# Altium PCB ADD.PcbDoc (part 1 of 3)
Units mm, origin at the board's own origin, x right, y up, seen from the top; angles counter-clockwise.
Board outline 193.67 x 275.84 mm, 2 copper layers (Top Layer, Bottom Layer); 216 components, 0 nets, 1200 pads, 0 vias.
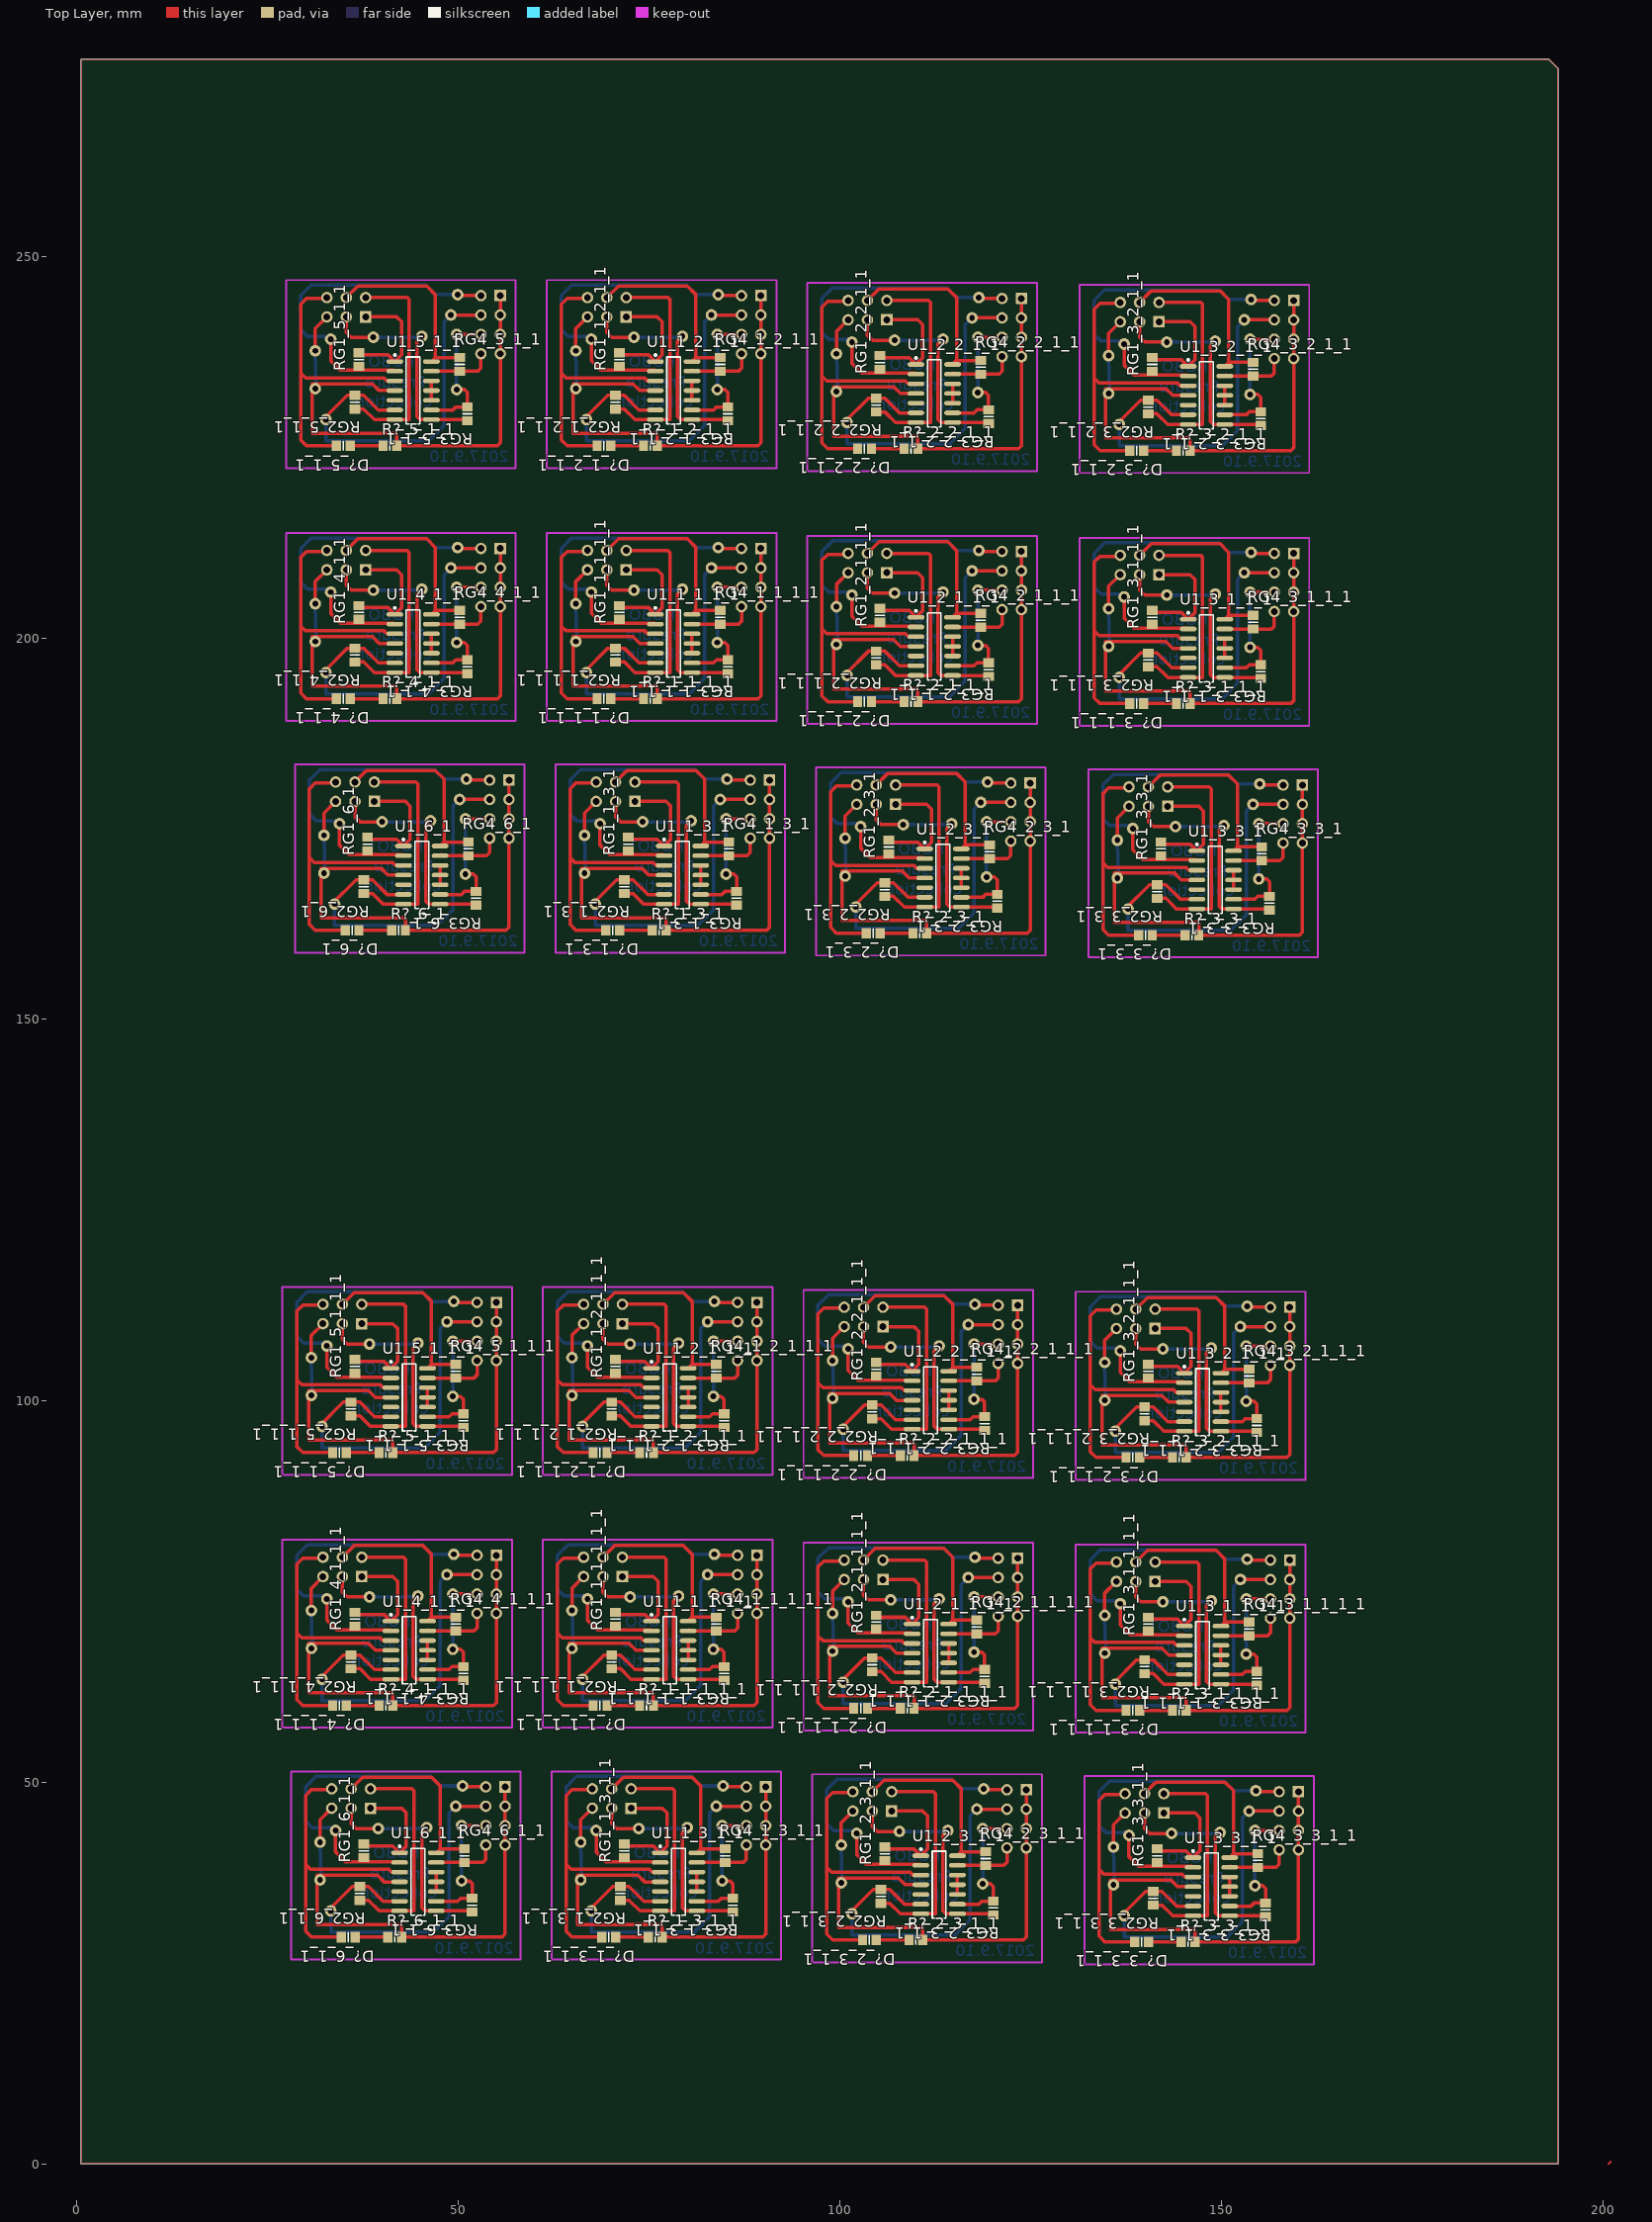
[diagram p0: Top Layer view]
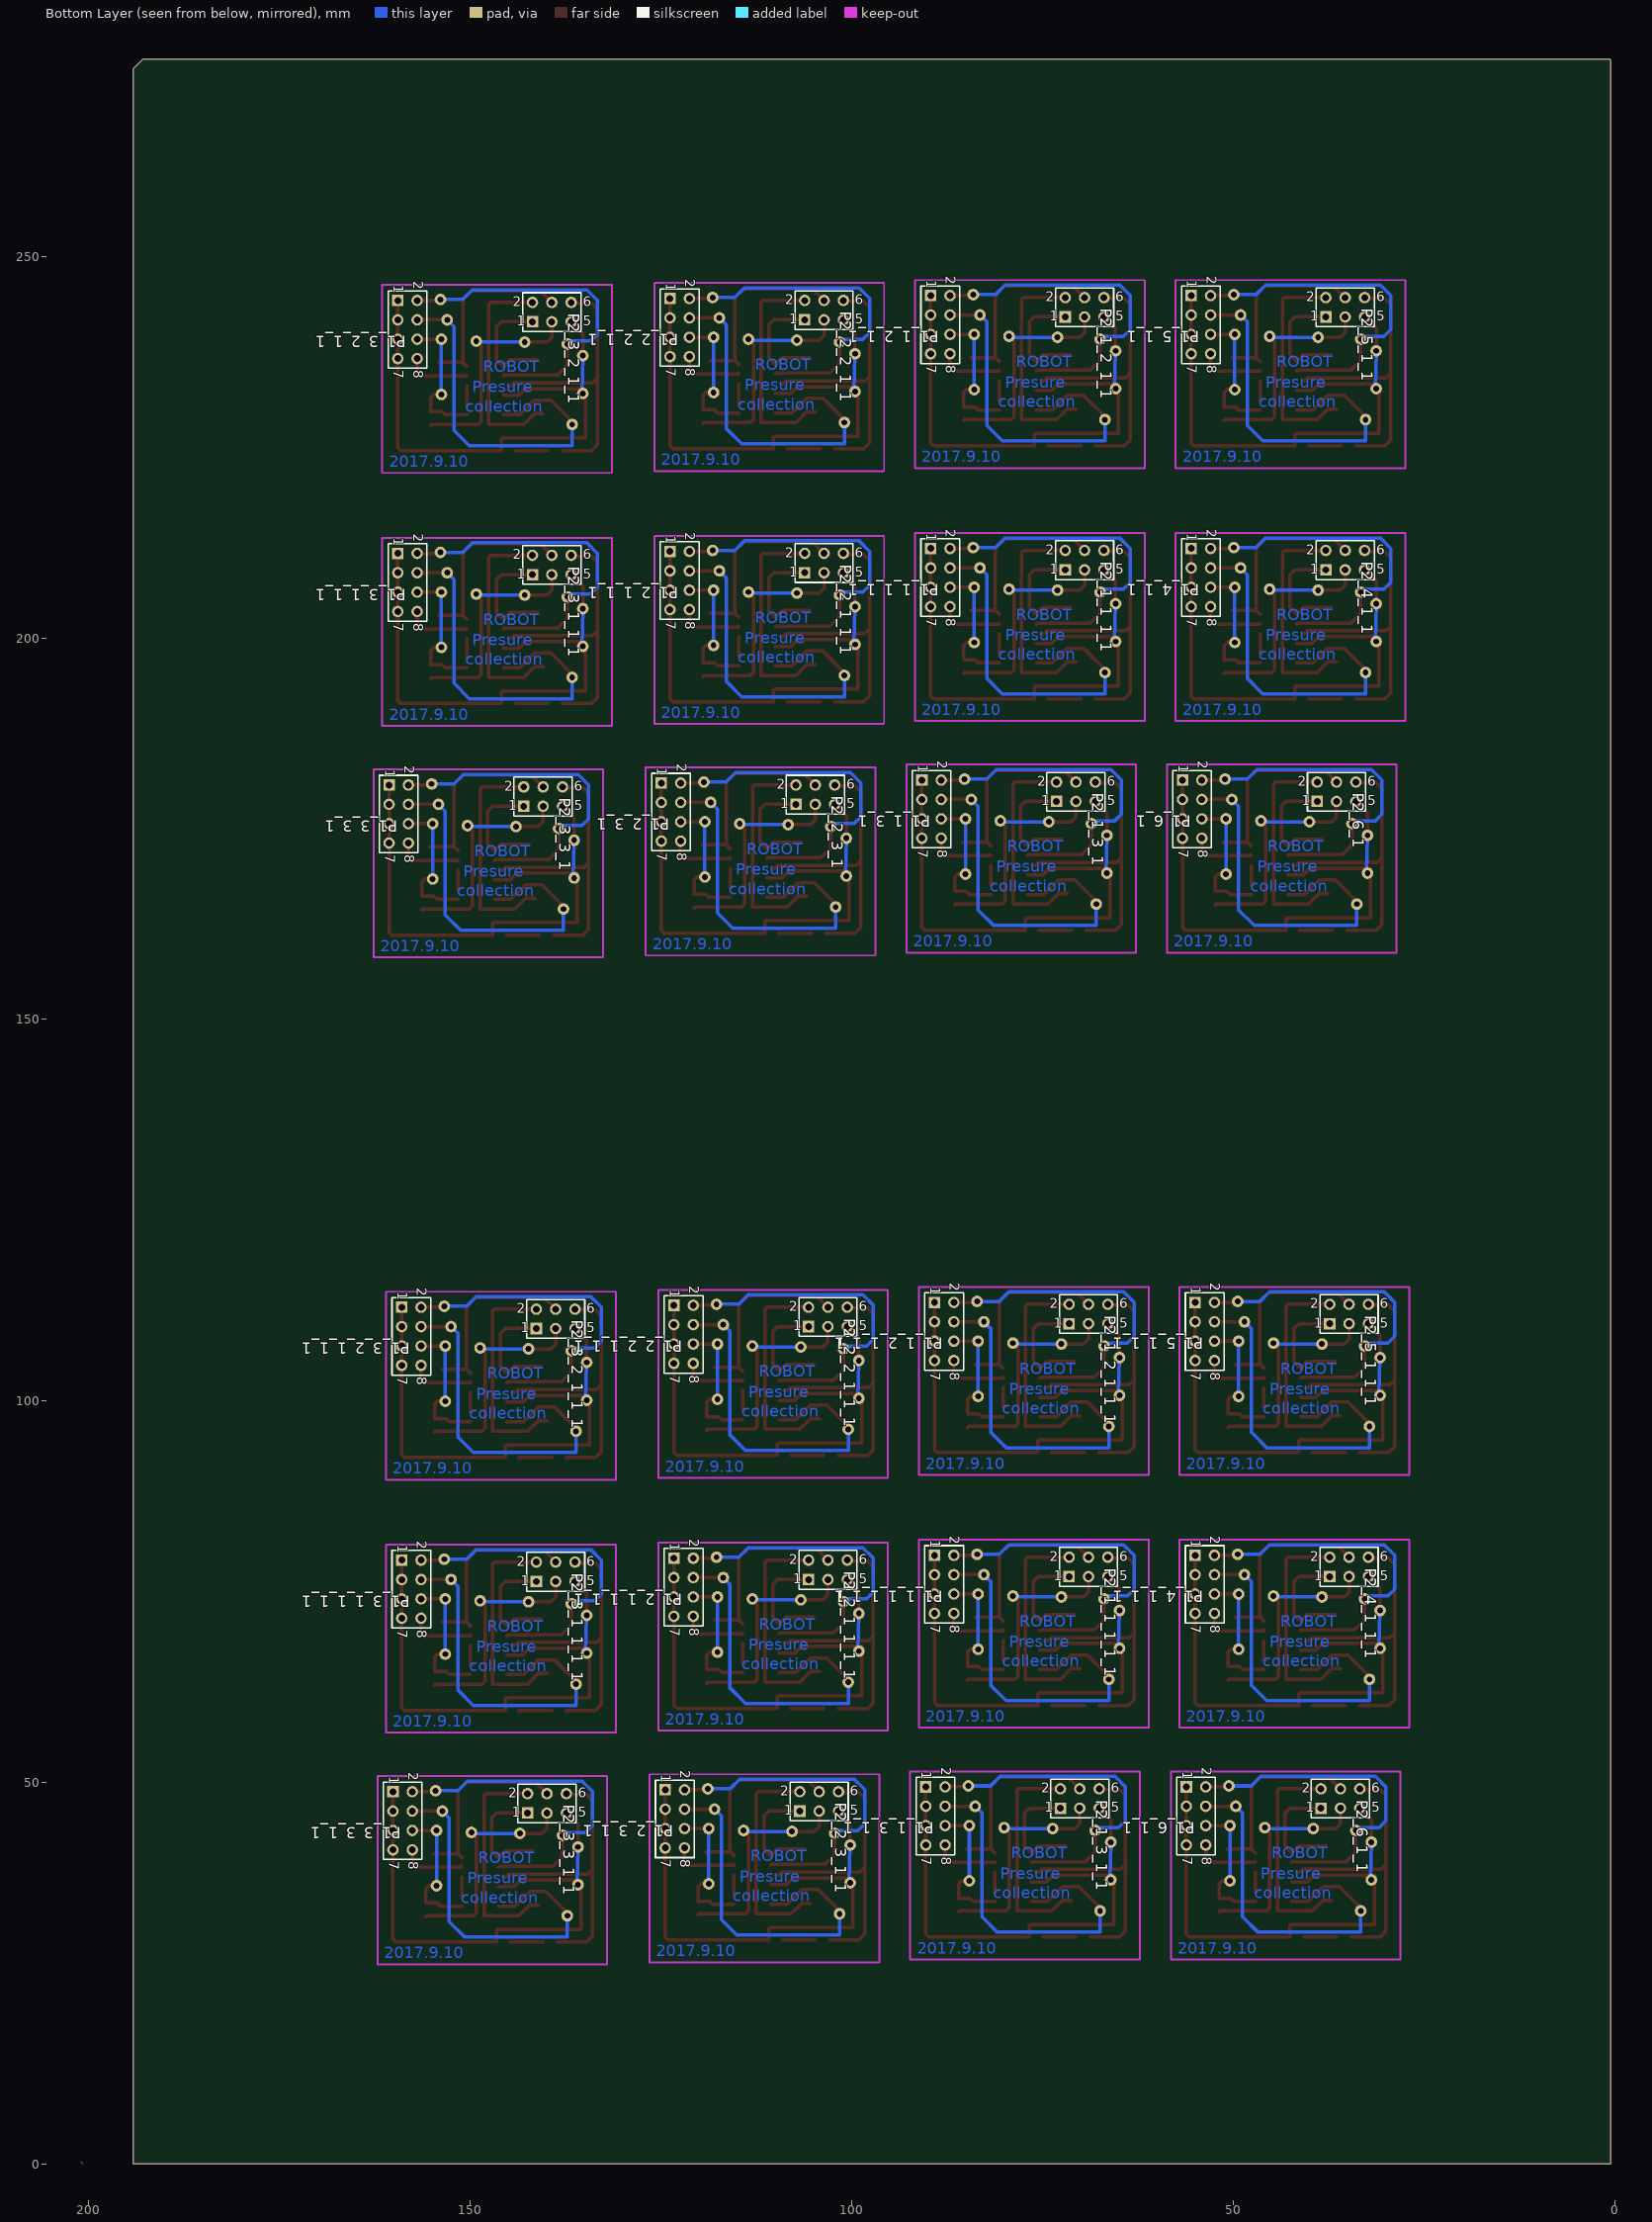
[diagram p1: Bottom Layer view, seen from below]

## Layer stack, top to bottom
Top Solder: solder mask 0.0102, Solder Resist, Dk 3.5
Top Layer: signal copper 0.0356
Dielectric1: dielectric 0.32, FR-4, Dk 4.8
Bottom Layer: signal copper 0.0356
Bottom Solder: solder mask 0.0102, Solder Resist, Dk 3.5

## Board outline
0.508,0 0.508,275.717 0.635,275.844 192.913,275.844 194.183,274.574 194.183,0

## Design rules (kind name [scope] priority, off if disabled: settings)
Clearance [All] p1: gap=0.254 ignorepadtopadclearanceinfootprint=FALSE except(0: Arc-Hole Track-Hole SMDPad-Hole THPad-Hole Via-Hole Fill-Hole Poly-Hole Region-Hole Text-Hole)
PolygonConnect [All] p1: connectstyle=Relief reliefconductorwidth=0.254 reliefentries=4 polygonreliefangle="90 Angle" airgapwidth=0.254
RoutingVias [All] p1: holewidth=0.711 width=1.27 viastyle="Through Hole" minholewidth=0.711 minwidth=1.27 maxholewidth=0.711 maxwidth=1.27
SilkToSolderMaskClearance SilkscreenOverComponentPads [IsPad] p1: minsilkscreentomaskgap=0.254 clearancetoexposedcopper=TRUE
SolderMaskExpansion [All] p1: expansion=0.102
Width [All] p1: maxlimit=0.254 minlimit=0.254 preferedwidth=0.254
29 further rules are at their usual default settings.

## Components (designator, comment, footprint, x,y, rotation, side; value= is the part's Value field where it differs from the comment)
D?_1_1_1_1 "LED3" 6-0805_N 69.075,192.024 r180 top (schematic designator D?)
D?_1_1_1_1_1 "LED3" 6-0805_N 68.567,60.071 r180 top (schematic designator D?)
D?_1_2_1_1 "LED3" 6-0805_N 69.075,225.171 r180 top (schematic designator D?)
D?_1_2_1_1_1 "LED3" 6-0805_N 68.567,93.218 r180 top (schematic designator D?)
D?_1_3_1 "LED3" 6-0805_N 70.218,161.671 r180 top (schematic designator D?)
D?_1_3_1_1 "LED3" 6-0805_N 69.71,29.718 r180 top (schematic designator D?)
D?_2_1_1_1 "LED3" 6-0805_N 103.238,191.643 r180 top (schematic designator D?)
D?_2_1_1_1_1 "LED3" 6-0805_N 102.73,59.69 r180 top (schematic designator D?)
D?_2_2_1_1 "LED3" 6-0805_N 103.238,224.79 r180 top (schematic designator D?)
D?_2_2_1_1_1 "LED3" 6-0805_N 102.73,92.837 r180 top (schematic designator D?)
D?_2_3_1 "LED3" 6-0805_N 104.381,161.29 r180 top (schematic designator D?)
D?_2_3_1_1 "LED3" 6-0805_N 103.873,29.337 r180 top (schematic designator D?)
D?_3_1_1_1 "LED3" 6-0805_N 138.925,191.389 r180 top (schematic designator D?)
D?_3_1_1_1_1 "LED3" 6-0805_N 138.417,59.436 r180 top (schematic designator D?)
D?_3_2_1_1 "LED3" 6-0805_N 138.925,224.536 r180 top (schematic designator D?)
D?_3_2_1_1_1 "LED3" 6-0805_N 138.417,92.583 r180 top (schematic designator D?)
D?_3_3_1 "LED3" 6-0805_N 140.068,161.036 r180 top (schematic designator D?)
D?_3_3_1_1 "LED3" 6-0805_N 139.56,29.083 r180 top (schematic designator D?)
D?_4_1_1 "LED3" 6-0805_N 34.912,192.024 r180 top (schematic designator D?)
D?_4_1_1_1 "LED3" 6-0805_N 34.404,60.071 r180 top (schematic designator D?)
D?_5_1_1 "LED3" 6-0805_N 34.912,225.171 r180 top (schematic designator D?)
D?_5_1_1_1 "LED3" 6-0805_N 34.404,93.218 r180 top (schematic designator D?)
D?_6_1 "LED3" 6-0805_N 36.055,161.671 r180 top (schematic designator D?)
D?_6_1_1 "LED3" 6-0805_N 35.547,29.718 r180 top (schematic designator D?)
P1_1_1_1_1 "FOOT" HDR2X4 89.649,211.709 r270 bottom (schematic designator P1)
P1_1_1_1_1_1 "FOOT" HDR2X4 89.141,79.756 r270 bottom (schematic designator P1)
P1_1_2_1_1 "FOOT" HDR2X4 89.649,244.856 r270 bottom (schematic designator P1)
P1_1_2_1_1_1 "FOOT" HDR2X4 89.141,112.903 r270 bottom (schematic designator P1)
P1_1_3_1 "FOOT" HDR2X4 90.792,181.356 r270 bottom (schematic designator P1)
P1_1_3_1_1 "FOOT" HDR2X4 90.284,49.403 r270 bottom (schematic designator P1)
P1_2_1_1_1 "FOOT" HDR2X4 123.812,211.328 r270 bottom (schematic designator P1)
P1_2_1_1_1_1 "FOOT" HDR2X4 123.304,79.375 r270 bottom (schematic designator P1)
P1_2_2_1_1 "FOOT" HDR2X4 123.812,244.475 r270 bottom (schematic designator P1)
P1_2_2_1_1_1 "FOOT" HDR2X4 123.304,112.522 r270 bottom (schematic designator P1)
P1_2_3_1 "FOOT" HDR2X4 124.955,180.975 r270 bottom (schematic designator P1)
P1_2_3_1_1 "FOOT" HDR2X4 124.447,49.022 r270 bottom (schematic designator P1)
P1_3_1_1_1 "FOOT" HDR2X4 159.499,211.074 r270 bottom (schematic designator P1)
P1_3_1_1_1_1 "FOOT" HDR2X4 158.991,79.121 r270 bottom (schematic designator P1)
P1_3_2_1_1 "FOOT" HDR2X4 159.499,244.221 r270 bottom (schematic designator P1)
P1_3_2_1_1_1 "FOOT" HDR2X4 158.991,112.268 r270 bottom (schematic designator P1)
P1_3_3_1 "FOOT" HDR2X4 160.642,180.721 r270 bottom (schematic designator P1)
P1_3_3_1_1 "FOOT" HDR2X4 160.134,48.768 r270 bottom (schematic designator P1)
P1_4_1_1 "FOOT" HDR2X4 55.486,211.709 r270 bottom (schematic designator P1)
P1_4_1_1_1 "FOOT" HDR2X4 54.978,79.756 r270 bottom (schematic designator P1)
P1_5_1_1 "FOOT" HDR2X4 55.486,244.856 r270 bottom (schematic designator P1)
P1_5_1_1_1 "FOOT" HDR2X4 54.978,112.903 r270 bottom (schematic designator P1)
P1_6_1 "FOOT" HDR2X4 56.629,181.356 r270 bottom (schematic designator P1)
P1_6_1_1 "FOOT" HDR2X4 56.121,49.403 r270 bottom (schematic designator P1)
P2_1_1_1_1 "foot" HDR2X3 71.996,208.915 r180 bottom (schematic designator P2)
P2_1_1_1_1_1 "foot" HDR2X3 71.488,76.962 r180 bottom (schematic designator P2)
P2_1_2_1_1 "foot" HDR2X3 71.996,242.062 r180 bottom (schematic designator P2)
P2_1_2_1_1_1 "foot" HDR2X3 71.488,110.109 r180 bottom (schematic designator P2)
P2_1_3_1 "foot" HDR2X3 73.139,178.562 r180 bottom (schematic designator P2)
P2_1_3_1_1 "foot" HDR2X3 72.631,46.609 r180 bottom (schematic designator P2)
P2_2_1_1_1 "foot" HDR2X3 106.159,208.534 r180 bottom (schematic designator P2)
P2_2_1_1_1_1 "foot" HDR2X3 105.651,76.581 r180 bottom (schematic designator P2)
P2_2_2_1_1 "foot" HDR2X3 106.159,241.681 r180 bottom (schematic designator P2)
P2_2_2_1_1_1 "foot" HDR2X3 105.651,109.728 r180 bottom (schematic designator P2)
P2_2_3_1 "foot" HDR2X3 107.302,178.181 r180 bottom (schematic designator P2)
P2_2_3_1_1 "foot" HDR2X3 106.794,46.228 r180 bottom (schematic designator P2)
P2_3_1_1_1 "foot" HDR2X3 141.846,208.28 r180 bottom (schematic designator P2)
P2_3_1_1_1_1 "foot" HDR2X3 141.338,76.327 r180 bottom (schematic designator P2)
P2_3_2_1_1 "foot" HDR2X3 141.846,241.427 r180 bottom (schematic designator P2)
P2_3_2_1_1_1 "foot" HDR2X3 141.338,109.474 r180 bottom (schematic designator P2)
P2_3_3_1 "foot" HDR2X3 142.989,177.927 r180 bottom (schematic designator P2)
P2_3_3_1_1 "foot" HDR2X3 142.481,45.974 r180 bottom (schematic designator P2)
P2_4_1_1 "foot" HDR2X3 37.833,208.915 r180 bottom (schematic designator P2)
P2_4_1_1_1 "foot" HDR2X3 37.325,76.962 r180 bottom (schematic designator P2)
P2_5_1_1 "foot" HDR2X3 37.833,242.062 r180 bottom (schematic designator P2)
P2_5_1_1_1 "foot" HDR2X3 37.325,110.109 r180 bottom (schematic designator P2)
P2_6_1 "foot" HDR2X3 38.976,178.562 r180 bottom (schematic designator P2)
P2_6_1_1 "foot" HDR2X3 38.468,46.609 r180 bottom (schematic designator P2)
R?_1_1_1_1 "Res3" 6-0805_N 75.171,192.024 r0 top value=1K (schematic designator R?)
R?_1_1_1_1_1 "Res3" 6-0805_N 74.663,60.071 r0 top value=1K (schematic designator R?)
R?_1_2_1_1 "Res3" 6-0805_N 75.171,225.171 r0 top value=1K (schematic designator R?)
R?_1_2_1_1_1 "Res3" 6-0805_N 74.663,93.218 r0 top value=1K (schematic designator R?)
R?_1_3_1 "Res3" 6-0805_N 76.314,161.671 r0 top value=1K (schematic designator R?)
R?_1_3_1_1 "Res3" 6-0805_N 75.806,29.718 r0 top value=1K (schematic designator R?)
R?_2_1_1_1 "Res3" 6-0805_N 109.334,191.643 r0 top value=1K (schematic designator R?)
R?_2_1_1_1_1 "Res3" 6-0805_N 108.826,59.69 r0 top value=1K (schematic designator R?)
R?_2_2_1_1 "Res3" 6-0805_N 109.334,224.79 r0 top value=1K (schematic designator R?)
R?_2_2_1_1_1 "Res3" 6-0805_N 108.826,92.837 r0 top value=1K (schematic designator R?)
R?_2_3_1 "Res3" 6-0805_N 110.477,161.29 r0 top value=1K (schematic designator R?)
R?_2_3_1_1 "Res3" 6-0805_N 109.969,29.337 r0 top value=1K (schematic designator R?)
R?_3_1_1_1 "Res3" 6-0805_N 145.021,191.389 r0 top value=1K (schematic designator R?)
R?_3_1_1_1_1 "Res3" 6-0805_N 144.513,59.436 r0 top value=1K (schematic designator R?)
R?_3_2_1_1 "Res3" 6-0805_N 145.021,224.536 r0 top value=1K (schematic designator R?)
R?_3_2_1_1_1 "Res3" 6-0805_N 144.513,92.583 r0 top value=1K (schematic designator R?)
R?_3_3_1 "Res3" 6-0805_N 146.164,161.036 r0 top value=1K (schematic designator R?)
R?_3_3_1_1 "Res3" 6-0805_N 145.656,29.083 r0 top value=1K (schematic designator R?)
R?_4_1_1 "Res3" 6-0805_N 41.008,192.024 r0 top value=1K (schematic designator R?)
R?_4_1_1_1 "Res3" 6-0805_N 40.5,60.071 r0 top value=1K (schematic designator R?)
R?_5_1_1 "Res3" 6-0805_N 41.008,225.171 r0 top value=1K (schematic designator R?)
R?_5_1_1_1 "Res3" 6-0805_N 40.5,93.218 r0 top value=1K (schematic designator R?)
R?_6_1 "Res3" 6-0805_N 42.151,161.671 r0 top value=1K (schematic designator R?)
R?_6_1_1 "Res3" 6-0805_N 41.643,29.718 r0 top value=1K (schematic designator R?)
RG1_1_1_1_1 "RES" 6-0805_N 71.107,203.327 r90 top value=4.7K (schematic designator RG1)
RG1_1_1_1_1_1 "RES" 6-0805_N 70.599,71.374 r90 top value=4.7K (schematic designator RG1)
RG1_1_2_1_1 "RES" 6-0805_N 71.107,236.474 r90 top value=4.7K (schematic designator RG1)
RG1_1_2_1_1_1 "RES" 6-0805_N 70.599,104.521 r90 top value=4.7K (schematic designator RG1)
RG1_1_3_1 "RES" 6-0805_N 72.25,172.974 r90 top value=4.7K (schematic designator RG1)
RG1_1_3_1_1 "RES" 6-0805_N 71.742,41.021 r90 top value=4.7K (schematic designator RG1)
RG1_2_1_1_1 "RES" 6-0805_N 105.27,202.946 r90 top value=4.7K (schematic designator RG1)
RG1_2_1_1_1_1 "RES" 6-0805_N 104.762,70.993 r90 top value=4.7K (schematic designator RG1)
RG1_2_2_1_1 "RES" 6-0805_N 105.27,236.093 r90 top value=4.7K (schematic designator RG1)
RG1_2_2_1_1_1 "RES" 6-0805_N 104.762,104.14 r90 top value=4.7K (schematic designator RG1)
RG1_2_3_1 "RES" 6-0805_N 106.413,172.593 r90 top value=4.7K (schematic designator RG1)
RG1_2_3_1_1 "RES" 6-0805_N 105.905,40.64 r90 top value=4.7K (schematic designator RG1)
RG1_3_1_1_1 "RES" 6-0805_N 140.957,202.692 r90 top value=4.7K (schematic designator RG1)
RG1_3_1_1_1_1 "RES" 6-0805_N 140.449,70.739 r90 top value=4.7K (schematic designator RG1)
RG1_3_2_1_1 "RES" 6-0805_N 140.957,235.839 r90 top value=4.7K (schematic designator RG1)
RG1_3_2_1_1_1 "RES" 6-0805_N 140.449,103.886 r90 top value=4.7K (schematic designator RG1)
RG1_3_3_1 "RES" 6-0805_N 142.1,172.339 r90 top value=4.7K (schematic designator RG1)
RG1_3_3_1_1 "RES" 6-0805_N 141.592,40.386 r90 top value=4.7K (schematic designator RG1)
RG1_4_1_1 "RES" 6-0805_N 36.944,203.327 r90 top value=4.7K (schematic designator RG1)
RG1_4_1_1_1 "RES" 6-0805_N 36.436,71.374 r90 top value=4.7K (schematic designator RG1)
RG1_5_1_1 "RES" 6-0805_N 36.944,236.474 r90 top value=4.7K (schematic designator RG1)
RG1_5_1_1_1 "RES" 6-0805_N 36.436,104.521 r90 top value=4.7K (schematic designator RG1)
RG1_6_1 "RES" 6-0805_N 38.087,172.974 r90 top value=4.7K (schematic designator RG1)
RG1_6_1_1 "RES" 6-0805_N 37.579,41.021 r90 top value=4.7K (schematic designator RG1)
RG2_1_1_1_1 "RES" 6-0805_N 70.599,197.739 r270 top value=4.7K (schematic designator RG2)
RG2_1_1_1_1_1 "RES" 6-0805_N 70.091,65.786 r270 top value=4.7K (schematic designator RG2)
RG2_1_2_1_1 "RES" 6-0805_N 70.599,230.886 r270 top value=4.7K (schematic designator RG2)
RG2_1_2_1_1_1 "RES" 6-0805_N 70.091,98.933 r270 top value=4.7K (schematic designator RG2)
RG2_1_3_1 "RES" 6-0805_N 71.742,167.386 r270 top value=4.7K (schematic designator RG2)
RG2_1_3_1_1 "RES" 6-0805_N 71.234,35.433 r270 top value=4.7K (schematic designator RG2)
RG2_2_1_1_1 "RES" 6-0805_N 104.762,197.358 r270 top value=4.7K (schematic designator RG2)
RG2_2_1_1_1_1 "RES" 6-0805_N 104.254,65.405 r270 top value=4.7K (schematic designator RG2)
RG2_2_2_1_1 "RES" 6-0805_N 104.762,230.505 r270 top value=4.7K (schematic designator RG2)
RG2_2_2_1_1_1 "RES" 6-0805_N 104.254,98.552 r270 top value=4.7K (schematic designator RG2)
RG2_2_3_1 "RES" 6-0805_N 105.905,167.005 r270 top value=4.7K (schematic designator RG2)
RG2_2_3_1_1 "RES" 6-0805_N 105.397,35.052 r270 top value=4.7K (schematic designator RG2)
RG2_3_1_1_1 "RES" 6-0805_N 140.449,197.104 r270 top value=4.7K (schematic designator RG2)
RG2_3_1_1_1_1 "RES" 6-0805_N 139.941,65.151 r270 top value=4.7K (schematic designator RG2)
RG2_3_2_1_1 "RES" 6-0805_N 140.449,230.251 r270 top value=4.7K (schematic designator RG2)
RG2_3_2_1_1_1 "RES" 6-0805_N 139.941,98.298 r270 top value=4.7K (schematic designator RG2)
RG2_3_3_1 "RES" 6-0805_N 141.592,166.751 r270 top value=4.7K (schematic designator RG2)
RG2_3_3_1_1 "RES" 6-0805_N 141.084,34.798 r270 top value=4.7K (schematic designator RG2)
RG2_4_1_1 "RES" 6-0805_N 36.436,197.739 r270 top value=4.7K (schematic designator RG2)
RG2_4_1_1_1 "RES" 6-0805_N 35.928,65.786 r270 top value=4.7K (schematic designator RG2)
RG2_5_1_1 "RES" 6-0805_N 36.436,230.886 r270 top value=4.7K (schematic designator RG2)
RG2_5_1_1_1 "RES" 6-0805_N 35.928,98.933 r270 top value=4.7K (schematic designator RG2)
RG2_6_1 "RES" 6-0805_N 37.579,167.386 r270 top value=4.7K (schematic designator RG2)
RG2_6_1_1 "RES" 6-0805_N 37.071,35.433 r270 top value=4.7K (schematic designator RG2)
RG3_1_1_1_1 "RES" 6-0805_N 85.331,196.215 r270 top value=4.7K (schematic designator RG3)
RG3_1_1_1_1_1 "RES" 6-0805_N 84.823,64.262 r270 top value=4.7K (schematic designator RG3)
RG3_1_2_1_1 "RES" 6-0805_N 85.331,229.362 r270 top value=4.7K (schematic designator RG3)
RG3_1_2_1_1_1 "RES" 6-0805_N 84.823,97.409 r270 top value=4.7K (schematic designator RG3)
RG3_1_3_1 "RES" 6-0805_N 86.474,165.862 r270 top value=4.7K (schematic designator RG3)
RG3_1_3_1_1 "RES" 6-0805_N 85.966,33.909 r270 top value=4.7K (schematic designator RG3)
RG3_2_1_1_1 "RES" 6-0805_N 119.494,195.834 r270 top value=4.7K (schematic designator RG3)
RG3_2_1_1_1_1 "RES" 6-0805_N 118.986,63.881 r270 top value=4.7K (schematic designator RG3)
RG3_2_2_1_1 "RES" 6-0805_N 119.494,228.981 r270 top value=4.7K (schematic designator RG3)
RG3_2_2_1_1_1 "RES" 6-0805_N 118.986,97.028 r270 top value=4.7K (schematic designator RG3)
RG3_2_3_1 "RES" 6-0805_N 120.637,165.481 r270 top value=4.7K (schematic designator RG3)
RG3_2_3_1_1 "RES" 6-0805_N 120.129,33.528 r270 top value=4.7K (schematic designator RG3)
RG3_3_1_1_1 "RES" 6-0805_N 155.181,195.58 r270 top value=4.7K (schematic designator RG3)
RG3_3_1_1_1_1 "RES" 6-0805_N 154.673,63.627 r270 top value=4.7K (schematic designator RG3)
RG3_3_2_1_1 "RES" 6-0805_N 155.181,228.727 r270 top value=4.7K (schematic designator RG3)
RG3_3_2_1_1_1 "RES" 6-0805_N 154.673,96.774 r270 top value=4.7K (schematic designator RG3)
RG3_3_3_1 "RES" 6-0805_N 156.324,165.227 r270 top value=4.7K (schematic designator RG3)
RG3_3_3_1_1 "RES" 6-0805_N 155.816,33.274 r270 top value=4.7K (schematic designator RG3)
RG3_4_1_1 "RES" 6-0805_N 51.168,196.215 r270 top value=4.7K (schematic designator RG3)
RG3_4_1_1_1 "RES" 6-0805_N 50.66,64.262 r270 top value=4.7K (schematic designator RG3)
RG3_5_1_1 "RES" 6-0805_N 51.168,229.362 r270 top value=4.7K (schematic designator RG3)
RG3_5_1_1_1 "RES" 6-0805_N 50.66,97.409 r270 top value=4.7K (schematic designator RG3)
RG3_6_1 "RES" 6-0805_N 52.311,165.862 r270 top value=4.7K (schematic designator RG3)
RG3_6_1_1 "RES" 6-0805_N 51.803,33.909 r270 top value=4.7K (schematic designator RG3)
RG4_1_1_1_1 "RES" 6-0805_N 84.315,202.692 r90 top value=4.7K (schematic designator RG4)
RG4_1_1_1_1_1 "RES" 6-0805_N 83.807,70.739 r90 top value=4.7K (schematic designator RG4)
RG4_1_2_1_1 "RES" 6-0805_N 84.315,235.839 r90 top value=4.7K (schematic designator RG4)
RG4_1_2_1_1_1 "RES" 6-0805_N 83.807,103.886 r90 top value=4.7K (schematic designator RG4)
RG4_1_3_1 "RES" 6-0805_N 85.458,172.339 r90 top value=4.7K (schematic designator RG4)
RG4_1_3_1_1 "RES" 6-0805_N 84.95,40.386 r90 top value=4.7K (schematic designator RG4)
RG4_2_1_1_1 "RES" 6-0805_N 118.478,202.311 r90 top value=4.7K (schematic designator RG4)
RG4_2_1_1_1_1 "RES" 6-0805_N 117.97,70.358 r90 top value=4.7K (schematic designator RG4)
RG4_2_2_1_1 "RES" 6-0805_N 118.478,235.458 r90 top value=4.7K (schematic designator RG4)
RG4_2_2_1_1_1 "RES" 6-0805_N 117.97,103.505 r90 top value=4.7K (schematic designator RG4)
RG4_2_3_1 "RES" 6-0805_N 119.621,171.958 r90 top value=4.7K (schematic designator RG4)
RG4_2_3_1_1 "RES" 6-0805_N 119.113,40.005 r90 top value=4.7K (schematic designator RG4)
RG4_3_1_1_1 "RES" 6-0805_N 154.165,202.057 r90 top value=4.7K (schematic designator RG4)
RG4_3_1_1_1_1 "RES" 6-0805_N 153.657,70.104 r90 top value=4.7K (schematic designator RG4)
RG4_3_2_1_1 "RES" 6-0805_N 154.165,235.204 r90 top value=4.7K (schematic designator RG4)
RG4_3_2_1_1_1 "RES" 6-0805_N 153.657,103.251 r90 top value=4.7K (schematic designator RG4)
RG4_3_3_1 "RES" 6-0805_N 155.308,171.704 r90 top value=4.7K (schematic designator RG4)
RG4_3_3_1_1 "RES" 6-0805_N 154.8,39.751 r90 top value=4.7K (schematic designator RG4)
RG4_4_1_1 "RES" 6-0805_N 50.152,202.692 r90 top value=4.7K (schematic designator RG4)
RG4_4_1_1_1 "RES" 6-0805_N 49.644,70.739 r90 top value=4.7K (schematic designator RG4)
RG4_5_1_1 "RES" 6-0805_N 50.152,235.839 r90 top value=4.7K (schematic designator RG4)
RG4_5_1_1_1 "RES" 6-0805_N 49.644,103.886 r90 top value=4.7K (schematic designator RG4)
RG4_6_1 "RES" 6-0805_N 51.295,172.339 r90 top value=4.7K (schematic designator RG4)
RG4_6_1_1 "RES" 6-0805_N 50.787,40.386 r90 top value=4.7K (schematic designator RG4)
U1_1_1_1_1 "LM324AD" SO14_N 78.219,199.263 r0 top (schematic designator U1)
U1_1_1_1_1_1 "LM324AD" SO14_N 77.711,67.31 r0 top (schematic designator U1)
U1_1_2_1_1 "LM324AD" SO14_N 78.219,232.41 r0 top (schematic designator U1)
U1_1_2_1_1_1 "LM324AD" SO14_N 77.711,100.457 r0 top (schematic designator U1)
U1_1_3_1 "LM324AD" SO14_N 79.362,168.91 r0 top (schematic designator U1)
U1_1_3_1_1 "LM324AD" SO14_N 78.854,36.957 r0 top (schematic designator U1)
U1_2_1_1_1 "LM324AD" SO14_N 112.382,198.882 r0 top (schematic designator U1)
U1_2_1_1_1_1 "LM324AD" SO14_N 111.874,66.929 r0 top (schematic designator U1)
U1_2_2_1_1 "LM324AD" SO14_N 112.382,232.029 r0 top (schematic designator U1)
U1_2_2_1_1_1 "LM324AD" SO14_N 111.874,100.076 r0 top (schematic designator U1)
U1_2_3_1 "LM324AD" SO14_N 113.525,168.529 r0 top (schematic designator U1)
U1_2_3_1_1 "LM324AD" SO14_N 113.017,36.576 r0 top (schematic designator U1)
U1_3_1_1_1 "LM324AD" SO14_N 148.069,198.628 r0 top (schematic designator U1)
U1_3_1_1_1_1 "LM324AD" SO14_N 147.561,66.675 r0 top (schematic designator U1)
U1_3_2_1_1 "LM324AD" SO14_N 148.069,231.775 r0 top (schematic designator U1)
U1_3_2_1_1_1 "LM324AD" SO14_N 147.561,99.822 r0 top (schematic designator U1)
U1_3_3_1 "LM324AD" SO14_N 149.212,168.275 r0 top (schematic designator U1)
U1_3_3_1_1 "LM324AD" SO14_N 148.704,36.322 r0 top (schematic designator U1)
U1_4_1_1 "LM324AD" SO14_N 44.056,199.263 r0 top (schematic designator U1)
U1_4_1_1_1 "LM324AD" SO14_N 43.548,67.31 r0 top (schematic designator U1)
U1_5_1_1 "LM324AD" SO14_N 44.056,232.41 r0 top (schematic designator U1)
U1_5_1_1_1 "LM324AD" SO14_N 43.548,100.457 r0 top (schematic designator U1)
U1_6_1 "LM324AD" SO14_N 45.199,168.91 r0 top (schematic designator U1)
U1_6_1_1 "LM324AD" SO14_N 44.691,36.957 r0 top (schematic designator U1)

## Footprints (in the part's own frame and the unit in brackets; to place one, negate y for a bottom-side part, rotate by r counter-clockwise, add the part's x,y. Pads: shape width x height; smd on the part's side, far side on the other; paste and mask are expansions set on the pad)
6-0805_N [mm] "Chip Resistor, Body 2.0x1.2mm, IPC Medium Density"
  rect 1.2x1.4 smd: 1(-0.9,0) 2(0.9,0)
  silkscreen extent 0,-0.6 0,0.6, body extent -1.07,-0.7 1.07,0.7, height 0.7
HDR2X3 [mm] "Connector; Header; 3x2 Position"
  rect 1.5x1.5 hole 0.9: 1(0,0)
  round 1.5 hole 0.9: 2(0,2.54) 3(2.54,0) 4(2.54,2.54) 5(5.08,0) 6(5.08,2.54)
  silkscreen extent -1.27,-1.27 6.35,3.81
HDR2X4 [mm] "Connector; Header; 4x2 Position"
  rect 1.5x1.5 hole 0.9: 1(0,0)
  round 1.5 hole 0.9: 2(0,2.54) 3(2.54,0) 4(2.54,2.54) 5(5.08,0) 6(5.08,2.54) 7(7.62,0) 8(7.62,2.54)
  silkscreen extent -1.27,-1.27 8.89,3.81
SO14_N [mm] "SOIC, 14-Leads, Body 8.7x3.9mm, Pitch 1.27mm, IPC Medium Density"
  oval 2.2x0.6 smd: 1(-2.4,3.81) 2(-2.4,2.54) 3(-2.4,1.27) 4(-2.4,0) 5(-2.4,-1.27) 6(-2.4,-2.54) 7(-2.4,-3.81) 8(2.4,-3.81) 9(2.4,-2.54) 10(2.4,-1.27) 11(2.4,0) 12(2.4,1.27) 13(2.4,2.54) 14(2.4,3.81)
  silkscreen extent -2.52,-4.4 0.9,4.78, body extent -1.95,-4.33 1.95,4.33, height 1.75

## Part data
D?_1_1_1_1 D?_1_1_1_1_1 D?_1_2_1_1 D?_1_2_1_1_1 D?_1_3_1 D?_1_3_1_1 D?_2_1_1_1 D?_2_1_1_1_1 D?_2_2_1_1 D?_2_2_1_1_1 D?_2_3_1 D?_2_3_1_1 D?_3_1_1_1 D?_3_1_1_1_1 D?_3_2_1_1 D?_3_2_1_1_1 D?_3_3_1 D?_3_3_1_1 D?_4_1_1 D?_4_1_1_1 D?_5_1_1 D?_5_1_1_1 D?_6_1 D?_6_1_1: "Typical BLUE SiC LED", DatasheetVersion=16-Apr-2002, LatestRevisionDate=17-Dec-2003, LatestRevisionNote="PCB Footprint replaced.", PackageReference=3.5X2.8X1.9, PackageVersion=16-Apr-2002, Published=8-Jun-2000, Publisher="Altium Limited"
P1_1_1_1_1 P1_1_1_1_1_1 P1_1_2_1_1 P1_1_2_1_1_1 P1_1_3_1 P1_1_3_1_1 P1_2_1_1_1 P1_2_1_1_1_1 P1_2_2_1_1 P1_2_2_1_1_1 P1_2_3_1 P1_2_3_1_1 P1_3_1_1_1 P1_3_1_1_1_1 P1_3_2_1_1 P1_3_2_1_1_1 P1_3_3_1 P1_3_3_1_1 P1_4_1_1 P1_4_1_1_1 P1_5_1_1 P1_5_1_1_1 P1_6_1 P1_6_1_1: library part "Header 4X2", "Header, 4-Pin, Dual row", LatestRevisionDate=17-Jul-2002, LatestRevisionNote="Re-released for DXP Platform.", Publisher="Altium Limited"
P2_1_1_1_1 P2_1_1_1_1_1 P2_1_2_1_1 P2_1_2_1_1_1 P2_1_3_1 P2_1_3_1_1 P2_2_1_1_1 P2_2_1_1_1_1 P2_2_2_1_1 P2_2_2_1_1_1 P2_2_3_1 P2_2_3_1_1 P2_3_1_1_1 P2_3_1_1_1_1 P2_3_2_1_1 P2_3_2_1_1_1 P2_3_3_1 P2_3_3_1_1 P2_4_1_1 P2_4_1_1_1 P2_5_1_1 P2_5_1_1_1 P2_6_1 P2_6_1_1: library part "Header 3X2", "Header, 3-Pin, Dual row", LatestRevisionDate=17-Jul-2002, LatestRevisionNote="Re-released for DXP Platform.", Publisher="Altium Limited"
R?_1_1_1_1 R?_1_1_1_1_1 R?_1_2_1_1 R?_1_2_1_1_1 R?_1_3_1 R?_1_3_1_1 R?_2_1_1_1 R?_2_1_1_1_1 R?_2_2_1_1 R?_2_2_1_1_1 R?_2_3_1 R?_2_3_1_1 R?_3_1_1_1 R?_3_1_1_1_1 R?_3_2_1_1 R?_3_2_1_1_1 R?_3_3_1 R?_3_3_1_1 R?_4_1_1 R?_4_1_1_1 R?_5_1_1 R?_5_1_1_1 R?_6_1 R?_6_1_1: "Resistor", LatestRevisionDate=29-May-2009, LatestRevisionNote="IPC-7351 Footprint Added.", PackageDescription="Chip Resistor", PackageReference=J1-0603, Published=8-Jun-2000, Publisher="Altium Limited"
RG1_1_1_1_1 RG1_1_1_1_1_1 RG1_1_2_1_1 RG1_1_2_1_1_1 RG1_1_3_1 RG1_1_3_1_1 RG1_2_1_1_1 RG1_2_1_1_1_1 RG1_2_2_1_1 RG1_2_2_1_1_1 RG1_2_3_1 RG1_2_3_1_1 RG1_3_1_1_1 RG1_3_1_1_1_1 RG1_3_2_1_1 RG1_3_2_1_1_1 RG1_3_3_1 RG1_3_3_1_1 RG1_4_1_1 RG1_4_1_1_1 RG1_5_1_1 RG1_5_1_1_1 RG1_6_1 RG1_6_1_1 RG2_1_1_1_1 RG2_1_1_1_1_1 RG2_1_2_1_1 RG2_1_2_1_1_1 RG2_1_3_1 RG2_1_3_1_1 RG2_2_1_1_1 RG2_2_1_1_1_1 RG2_2_2_1_1 RG2_2_2_1_1_1 RG2_2_3_1 RG2_2_3_1_1 RG2_3_1_1_1 RG2_3_1_1_1_1 RG2_3_2_1_1 RG2_3_2_1_1_1 RG2_3_3_1 RG2_3_3_1_1 RG2_4_1_1 RG2_4_1_1_1 RG2_5_1_1 RG2_5_1_1_1 RG2_6_1 RG2_6_1_1 RG3_1_1_1_1 RG3_1_1_1_1_1 RG3_1_2_1_1 RG3_1_2_1_1_1 RG3_1_3_1 RG3_1_3_1_1 RG3_2_1_1_1 RG3_2_1_1_1_1 RG3_2_2_1_1 RG3_2_2_1_1_1 RG3_2_3_1 RG3_2_3_1_1 RG3_3_1_1_1 RG3_3_1_1_1_1 RG3_3_2_1_1 RG3_3_2_1_1_1 RG3_3_3_1 RG3_3_3_1_1 RG3_4_1_1 RG3_4_1_1_1 RG3_5_1_1 RG3_5_1_1_1 RG3_6_1 RG3_6_1_1 RG4_1_1_1_1 RG4_1_1_1_1_1 RG4_1_2_1_1 RG4_1_2_1_1_1 RG4_1_3_1 RG4_1_3_1_1 RG4_2_1_1_1 RG4_2_1_1_1_1 RG4_2_2_1_1 RG4_2_2_1_1_1 RG4_2_3_1 RG4_2_3_1_1 RG4_3_1_1_1 RG4_3_1_1_1_1 RG4_3_2_1_1 RG4_3_2_1_1_1 RG4_3_3_1 RG4_3_3_1_1 RG4_4_1_1 RG4_4_1_1_1 RG4_5_1_1 RG4_5_1_1_1 RG4_6_1 RG4_6_1_1: library part Res3, "Resistor", LatestRevisionDate=29-May-2009, LatestRevisionNote="IPC-7351 Footprint Added.", PackageDescription="Chip Resistor", PackageReference=J1-0603, Published=8-Jun-2000, Publisher="Altium Limited"
U1_1_1_1_1 U1_1_1_1_1_1 U1_1_2_1_1 U1_1_2_1_1_1 U1_1_3_1 U1_1_3_1_1 U1_2_1_1_1 U1_2_1_1_1_1 U1_2_2_1_1 U1_2_2_1_1_1 U1_2_3_1 U1_2_3_1_1 U1_3_1_1_1 U1_3_1_1_1_1 U1_3_2_1_1 U1_3_2_1_1_1 U1_3_3_1 U1_3_3_1_1 U1_4_1_1 U1_4_1_1_1 U1_5_1_1 U1_5_1_1_1 U1_6_1 U1_6_1_1: "Low-Power Quad Operational Amplifier", Code_IPC=SOIC127P600-14, ComponentLink1Description="Manufacturer Link", ComponentLink1URL=http://www.st.com/, ComponentLink2Description=Datasheet, ComponentLink2URL=http://www.st.com/stonline/products/literature/ds/4797/lm224a.pdf, DatasheetVersion=Nov-1997, LatestRevisionDate=13-Apr-2006, LatestRevisionNote="IPC-7351 Footprint Added.", PackageDescription="14-Pin Small Outline Integrated Circuit 1.27 mm Pitch", PackageReference=SO14, PackageVersion=Sep-1998, Published=24-Aug-2001, Publisher="Altium Limited"

## Free pads (board coordinates)
  round 1.524 hole 0.762: 2(38.341,74.295) 2(38.341,107.442) 2(38.849,206.248) 2(38.849,239.395) 2(39.484,43.942) 2(39.992,175.895) 2(72.504,74.295) 2(72.504,107.442) 2(73.012,206.248) 2(73.012,239.395) 2(73.647,43.942) 2(74.155,175.895) 2(106.667,73.914) 2(106.667,107.061) 2(107.175,205.867) 2(107.175,239.014) 2(107.81,43.561) 2(108.318,175.514) 2(142.354,73.66) 2(142.354,106.807) 2(142.862,205.613) 2(142.862,238.76) 2(143.497,43.307) 2(144.005,175.26) 3(44.691,74.422) 3(44.691,107.569) 3(45.199,206.375) 3(45.199,239.522) 3(45.834,44.069) 3(46.342,176.022) 3(78.854,74.422) 3(78.854,107.569) 3(79.362,206.375) 3(79.362,239.522) 3(79.997,44.069) 3(80.505,176.022) 3(113.017,74.041) 3(113.017,107.188) 3(113.525,205.994) 3(113.525,239.141) 3(114.16,43.688) 3(114.668,175.641) 3(148.704,73.787) 3(148.704,106.934) 3(149.212,205.74) 3(149.212,238.887) 3(149.847,43.434) 3(150.355,175.387) 4(49.263,74.676) 4(49.263,107.823) 4(49.771,206.629) 4(49.771,239.776) 4(50.406,44.323) 4(50.914,176.276) 4(83.426,74.676) 4(83.426,107.823) 4(83.934,206.629) 4(83.934,239.776) 4(84.569,44.323) 4(85.077,176.276) 4(117.589,74.295) 4(117.589,107.442) 4(118.097,206.248) 4(118.097,239.395) 4(118.732,43.942) 4(119.24,175.895) 4(153.276,74.041) 4(153.276,107.188) 4(153.784,205.994) 4(153.784,239.141) 4(154.419,43.688) 4(154.927,175.641) 5(49.263,67.437) 5(49.263,100.584) 5(49.771,199.39) 5(49.771,232.537) 5(50.406,37.084) 5(50.914,169.037) 5(83.426,67.437) 5(83.426,100.584) 5(83.934,199.39) 5(83.934,232.537) 5(84.569,37.084) 5(85.077,169.037) 5(117.589,67.056) 5(117.589,100.203) 5(118.097,199.009) 5(118.097,232.156) 5(118.732,36.703) 5(119.24,168.656) 5(153.276,66.802) 5(153.276,99.949) 5(153.784,198.755) 5(153.784,231.902) 5(154.419,36.449) 5(154.927,168.402) 6(30.721,72.517) 6(30.721,105.664) 6(31.229,204.47) 6(31.229,237.617) 6(31.864,42.164) 6(32.372,174.117) 6(64.884,72.517) 6(64.884,105.664) 6(65.392,204.47) 6(65.392,237.617) 6(66.027,42.164) 6(66.535,174.117) 6(99.047,72.136) 6(99.047,105.283) 6(99.555,204.089) 6(99.555,237.236) 6(100.19,41.783) 6(100.698,173.736) 6(134.734,71.882) 6(134.734,105.029) 6(135.242,203.835) 6(135.242,236.982) 6(135.877,41.529) 6(136.385,173.482) 7(30.721,67.564) 7(30.721,100.711) 7(31.229,199.517) 7(31.229,232.664) 7(31.864,37.211) 7(32.372,169.164) 7(64.884,67.564) 7(64.884,100.711) 7(65.392,199.517) 7(65.392,232.664) 7(66.027,37.211) 7(66.535,169.164) 7(99.047,67.183) 7(99.047,100.33) 7(99.555,199.136) 7(99.555,232.283) 7(100.19,36.83) 7(100.698,168.783) 7(134.734,66.929) 7(134.734,100.076) 7(135.242,198.882) 7(135.242,232.029) 7(135.877,36.576) 7(136.385,168.529) 8(32.118,63.5) 8(32.118,96.647) 8(32.626,195.453) 8(32.626,228.6) 8(33.261,33.147) 8(33.769,165.1) 8(66.281,63.5) 8(66.281,96.647) 8(66.789,195.453) 8(66.789,228.6) 8(67.424,33.147) 8(67.932,165.1) 8(100.444,63.119) 8(100.444,96.266) 8(100.952,195.072) 8(100.952,228.219) 8(101.587,32.766) 8(102.095,164.719) 8(136.131,62.865) 8(136.131,96.012) 8(136.639,194.818) 8(136.639,227.965) 8(137.274,32.512) 8(137.782,164.465) 9(48.501,77.216) 9(48.501,110.363) 9(49.009,209.169) 9(49.009,242.316) 9(49.644,46.863) 9(50.152,178.816) 9(82.664,77.216) 9(82.664,110.363) 9(83.172,209.169) 9(83.172,242.316) 9(83.807,46.863) 9(84.315,178.816) 9(116.827,76.835) 9(116.827,109.982) 9(117.335,208.788) 9(117.335,241.935) 9(117.97,46.482) 9(118.478,178.435) 9(152.514,76.581) 9(152.514,109.728) 9(153.022,208.534) 9(153.022,241.681) 9(153.657,46.228) 9(154.165,178.181) 10(49.39,79.883) 10(49.39,113.03) 10(49.898,211.836) 10(49.898,244.983) 10(50.533,49.53) 10(51.041,181.483) 10(83.553,79.883) 10(83.553,113.03) 10(84.061,211.836) 10(84.061,244.983) 10(84.696,49.53) 10(85.204,181.483) 10(117.716,79.502) 10(117.716,112.649) 10(118.224,211.455) 10(118.224,244.602) 10(118.859,49.149) 10(119.367,181.102) 10(153.403,79.248) 10(153.403,112.395) 10(153.911,211.201) 10(153.911,244.348) 10(154.546,48.895) 10(155.054,180.848) 12(32.753,74.041) 12(32.753,107.188) 12(33.261,205.994) 12(33.261,239.141) 12(33.896,43.688) 12(34.404,175.641) 12(66.916,74.041) 12(66.916,107.188) 12(67.424,205.994) 12(67.424,239.141) 12(68.059,43.688) 12(68.567,175.641) 12(101.079,73.66) 12(101.079,106.807) 12(101.587,205.613) 12(101.587,238.76) 12(102.222,43.307) 12(102.73,175.26) 12(136.766,73.406) 12(136.766,106.553) 12(137.274,205.359) 12(137.274,238.506) 12(137.909,43.053) 12(138.417,175.006)

## Nets (pads, with @x,y where several pads share a name; then routed paths per layer and width w, separated by ;. In a path a pad name is that pad's centre, name@x,y a point inside that pad or via, vN(x,y) a via of type N, cw(c..) or ccw(c..) an arc to the next point about the centre after c; other vN are vias at no path point)
pads on no net: D?_1_1_1_1.1 D?_1_1_1_1.2 D?_1_1_1_1_1.1 D?_1_1_1_1_1.2 D?_1_2_1_1.1 D?_1_2_1_1.2 D?_1_2_1_1_1.1 D?_1_2_1_1_1.2 D?_1_3_1.1 D?_1_3_1.2 D?_1_3_1_1.1 D?_1_3_1_1.2 D?_2_1_1_1.1 D?_2_1_1_1.2 D?_2_1_1_1_1.1 D?_2_1_1_1_1.2 D?_2_2_1_1.1 D?_2_2_1_1.2 D?_2_2_1_1_1.1 D?_2_2_1_1_1.2 D?_2_3_1.1 D?_2_3_1.2 D?_2_3_1_1.1 D?_2_3_1_1.2 D?_3_1_1_1.1 D?_3_1_1_1.2 D?_3_1_1_1_1.1 D?_3_1_1_1_1.2 D?_3_2_1_1.1 D?_3_2_1_1.2 D?_3_2_1_1_1.1 D?_3_2_1_1_1.2 D?_3_3_1.1 D?_3_3_1.2 D?_3_3_1_1.1 D?_3_3_1_1.2 D?_4_1_1.1 D?_4_1_1.2 D?_4_1_1_1.1 D?_4_1_1_1.2 D?_5_1_1.1 D?_5_1_1.2 D?_5_1_1_1.1 D?_5_1_1_1.2 D?_6_1.1 D?_6_1.2 D?_6_1_1.1 D?_6_1_1.2 P1_1_1_1_1.1 P1_1_1_1_1.2 P1_1_1_1_1.3 P1_1_1_1_1.4 P1_1_1_1_1.5 P1_1_1_1_1.6 P1_1_1_1_1.7 P1_1_1_1_1.8 P1_1_1_1_1_1.1 P1_1_1_1_1_1.2 P1_1_1_1_1_1.3 P1_1_1_1_1_1.4 P1_1_1_1_1_1.5 P1_1_1_1_1_1.6 P1_1_1_1_1_1.7 P1_1_1_1_1_1.8 P1_1_2_1_1.1 P1_1_2_1_1.2 P1_1_2_1_1.3 P1_1_2_1_1.4 P1_1_2_1_1.5 P1_1_2_1_1.6 P1_1_2_1_1.7 P1_1_2_1_1.8 P1_1_2_1_1_1.1 P1_1_2_1_1_1.2 P1_1_2_1_1_1.3 P1_1_2_1_1_1.4 P1_1_2_1_1_1.5 P1_1_2_1_1_1.6 P1_1_2_1_1_1.7 P1_1_2_1_1_1.8 P1_1_3_1.1 P1_1_3_1.2 P1_1_3_1.3 P1_1_3_1.4 P1_1_3_1.5 P1_1_3_1.6 P1_1_3_1.7 P1_1_3_1.8 P1_1_3_1_1.1 P1_1_3_1_1.2 P1_1_3_1_1.3 P1_1_3_1_1.4 P1_1_3_1_1.5 P1_1_3_1_1.6 P1_1_3_1_1.7 P1_1_3_1_1.8 P1_2_1_1_1.1 P1_2_1_1_1.2 P1_2_1_1_1.3 P1_2_1_1_1.4 P1_2_1_1_1.5 P1_2_1_1_1.6 P1_2_1_1_1.7 P1_2_1_1_1.8 P1_2_1_1_1_1.1 P1_2_1_1_1_1.2 P1_2_1_1_1_1.3 P1_2_1_1_1_1.4 P1_2_1_1_1_1.5 P1_2_1_1_1_1.6 P1_2_1_1_1_1.7 P1_2_1_1_1_1.8 P1_2_2_1_1.1 P1_2_2_1_1.2 P1_2_2_1_1.3 P1_2_2_1_1.4 P1_2_2_1_1.5 P1_2_2_1_1.6 P1_2_2_1_1.7 P1_2_2_1_1.8 P1_2_2_1_1_1.1 P1_2_2_1_1_1.2 P1_2_2_1_1_1.3 P1_2_2_1_1_1.4 P1_2_2_1_1_1.5 P1_2_2_1_1_1.6 P1_2_2_1_1_1.7 P1_2_2_1_1_1.8 P1_2_3_1.1 P1_2_3_1.2 P1_2_3_1.3 P1_2_3_1.4 P1_2_3_1.5 P1_2_3_1.6 P1_2_3_1.7 P1_2_3_1.8 P1_2_3_1_1.1 P1_2_3_1_1.2 P1_2_3_1_1.3 P1_2_3_1_1.4 P1_2_3_1_1.5 P1_2_3_1_1.6 P1_2_3_1_1.7 P1_2_3_1_1.8 P1_3_1_1_1.1 P1_3_1_1_1.2 P1_3_1_1_1.3 P1_3_1_1_1.4 P1_3_1_1_1.5 P1_3_1_1_1.6 P1_3_1_1_1.7 P1_3_1_1_1.8 P1_3_1_1_1_1.1 P1_3_1_1_1_1.2 P1_3_1_1_1_1.3 P1_3_1_1_1_1.4 P1_3_1_1_1_1.5 P1_3_1_1_1_1.6 P1_3_1_1_1_1.7 P1_3_1_1_1_1.8 P1_3_2_1_1.1 P1_3_2_1_1.2 P1_3_2_1_1.3 P1_3_2_1_1.4 P1_3_2_1_1.5 P1_3_2_1_1.6 P1_3_2_1_1.7 P1_3_2_1_1.8 P1_3_2_1_1_1.1 P1_3_2_1_1_1.2 P1_3_2_1_1_1.3 P1_3_2_1_1_1.4 P1_3_2_1_1_1.5 P1_3_2_1_1_1.6 P1_3_2_1_1_1.7 P1_3_2_1_1_1.8 P1_3_3_1.1 P1_3_3_1.2 P1_3_3_1.3 P1_3_3_1.4 P1_3_3_1.5 P1_3_3_1.6 P1_3_3_1.7 P1_3_3_1.8 P1_3_3_1_1.1 P1_3_3_1_1.2 P1_3_3_1_1.3 P1_3_3_1_1.4 P1_3_3_1_1.5 P1_3_3_1_1.6 P1_3_3_1_1.7 P1_3_3_1_1.8 P1_4_1_1.1 P1_4_1_1.2 P1_4_1_1.3 P1_4_1_1.4 P1_4_1_1.5 P1_4_1_1.6 P1_4_1_1.7 P1_4_1_1.8 P1_4_1_1_1.1 P1_4_1_1_1.2 P1_4_1_1_1.3 P1_4_1_1_1.4 P1_4_1_1_1.5 P1_4_1_1_1.6 P1_4_1_1_1.7 P1_4_1_1_1.8 P1_5_1_1.1 P1_5_1_1.2 P1_5_1_1.3 P1_5_1_1.4 P1_5_1_1.5 P1_5_1_1.6 P1_5_1_1.7 P1_5_1_1.8 P1_5_1_1_1.1 P1_5_1_1_1.2 P1_5_1_1_1.3 P1_5_1_1_1.4 P1_5_1_1_1.5 P1_5_1_1_1.6 P1_5_1_1_1.7 P1_5_1_1_1.8 P1_6_1.1 P1_6_1.2 P1_6_1.3 P1_6_1.4 P1_6_1.5 P1_6_1.6 P1_6_1.7 P1_6_1.8 P1_6_1_1.1 P1_6_1_1.2 P1_6_1_1.3 P1_6_1_1.4 P1_6_1_1.5 P1_6_1_1.6 P1_6_1_1.7 P1_6_1_1.8 P2_1_1_1_1.1 P2_1_1_1_1.2 P2_1_1_1_1.3 P2_1_1_1_1.4 P2_1_1_1_1.5 P2_1_1_1_1.6 P2_1_1_1_1_1.1 P2_1_1_1_1_1.2 P2_1_1_1_1_1.3 P2_1_1_1_1_1.4 P2_1_1_1_1_1.5 P2_1_1_1_1_1.6 P2_1_2_1_1.1 P2_1_2_1_1.2 P2_1_2_1_1.3 P2_1_2_1_1.4 P2_1_2_1_1.5 P2_1_2_1_1.6 P2_1_2_1_1_1.1 P2_1_2_1_1_1.2 P2_1_2_1_1_1.3 P2_1_2_1_1_1.4 P2_1_2_1_1_1.5 P2_1_2_1_1_1.6 P2_1_3_1.1 P2_1_3_1.2 P2_1_3_1.3 P2_1_3_1.4 P2_1_3_1.5 P2_1_3_1.6 P2_1_3_1_1.1 P2_1_3_1_1.2 P2_1_3_1_1.3 P2_1_3_1_1.4 P2_1_3_1_1.5 P2_1_3_1_1.6 P2_2_1_1_1.1 P2_2_1_1_1.2 P2_2_1_1_1.3 P2_2_1_1_1.4 P2_2_1_1_1.5 P2_2_1_1_1.6 P2_2_1_1_1_1.1 P2_2_1_1_1_1.2 P2_2_1_1_1_1.3 P2_2_1_1_1_1.4 P2_2_1_1_1_1.5 P2_2_1_1_1_1.6 P2_2_2_1_1.1 P2_2_2_1_1.2 P2_2_2_1_1.3 P2_2_2_1_1.4 P2_2_2_1_1.5 P2_2_2_1_1.6 P2_2_2_1_1_1.1 P2_2_2_1_1_1.2 P2_2_2_1_1_1.3 P2_2_2_1_1_1.4 P2_2_2_1_1_1.5 P2_2_2_1_1_1.6 P2_2_3_1.1 P2_2_3_1.2 P2_2_3_1.3 P2_2_3_1.4 P2_2_3_1.5 P2_2_3_1.6 P2_2_3_1_1.1 P2_2_3_1_1.2 P2_2_3_1_1.3 P2_2_3_1_1.4 P2_2_3_1_1.5 P2_2_3_1_1.6 P2_3_1_1_1.1 P2_3_1_1_1.2 P2_3_1_1_1.3 P2_3_1_1_1.4 P2_3_1_1_1.5 P2_3_1_1_1.6 P2_3_1_1_1_1.1 P2_3_1_1_1_1.2 P2_3_1_1_1_1.3 P2_3_1_1_1_1.4 P2_3_1_1_1_1.5 P2_3_1_1_1_1.6 P2_3_2_1_1.1 P2_3_2_1_1.2 P2_3_2_1_1.3 P2_3_2_1_1.4 P2_3_2_1_1.5 P2_3_2_1_1.6 P2_3_2_1_1_1.1 P2_3_2_1_1_1.2 P2_3_2_1_1_1.3 P2_3_2_1_1_1.4 P2_3_2_1_1_1.5 P2_3_2_1_1_1.6 P2_3_3_1.1 P2_3_3_1.2 P2_3_3_1.3 P2_3_3_1.4 P2_3_3_1.5 P2_3_3_1.6 P2_3_3_1_1.1 P2_3_3_1_1.2 P2_3_3_1_1.3 P2_3_3_1_1.4 P2_3_3_1_1.5 P2_3_3_1_1.6 P2_4_1_1.1 P2_4_1_1.2 P2_4_1_1.3 P2_4_1_1.4 P2_4_1_1.5 P2_4_1_1.6 P2_4_1_1_1.1 P2_4_1_1_1.2 P2_4_1_1_1.3 P2_4_1_1_1.4 P2_4_1_1_1.5 P2_4_1_1_1.6 P2_5_1_1.1 P2_5_1_1.2 P2_5_1_1.3 P2_5_1_1.4 P2_5_1_1.5 P2_5_1_1.6 P2_5_1_1_1.1 P2_5_1_1_1.2 P2_5_1_1_1.3 P2_5_1_1_1.4 P2_5_1_1_1.5 P2_5_1_1_1.6 P2_6_1.1 P2_6_1.2 P2_6_1.3 P2_6_1.4 P2_6_1.5 P2_6_1.6 P2_6_1_1.1 P2_6_1_1.2 P2_6_1_1.3 P2_6_1_1.4 P2_6_1_1.5 P2_6_1_1.6 R?_1_1_1_1.1 R?_1_1_1_1.2 R?_1_1_1_1_1.1 R?_1_1_1_1_1.2 R?_1_2_1_1.1 R?_1_2_1_1.2 R?_1_2_1_1_1.1 R?_1_2_1_1_1.2 R?_1_3_1.1 R?_1_3_1.2 R?_1_3_1_1.1 R?_1_3_1_1.2 R?_2_1_1_1.1 R?_2_1_1_1.2 R?_2_1_1_1_1.1 R?_2_1_1_1_1.2 R?_2_2_1_1.1 R?_2_2_1_1.2 R?_2_2_1_1_1.1 R?_2_2_1_1_1.2 R?_2_3_1.1 R?_2_3_1.2 R?_2_3_1_1.1 R?_2_3_1_1.2 R?_3_1_1_1.1 R?_3_1_1_1.2 R?_3_1_1_1_1.1 R?_3_1_1_1_1.2 R?_3_2_1_1.1 R?_3_2_1_1.2 R?_3_2_1_1_1.1 R?_3_2_1_1_1.2 R?_3_3_1.1 R?_3_3_1.2 R?_3_3_1_1.1 R?_3_3_1_1.2 R?_4_1_1.1 R?_4_1_1.2 R?_4_1_1_1.1 R?_4_1_1_1.2 R?_5_1_1.1 R?_5_1_1.2 R?_5_1_1_1.1 R?_5_1_1_1.2 R?_6_1.1 R?_6_1.2 R?_6_1_1.1 R?_6_1_1.2 RG1_1_1_1_1.1 RG1_1_1_1_1.2 RG1_1_1_1_1_1.1 RG1_1_1_1_1_1.2 RG1_1_2_1_1.1 RG1_1_2_1_1.2 RG1_1_2_1_1_1.1 RG1_1_2_1_1_1.2 RG1_1_3_1.1 RG1_1_3_1.2 RG1_1_3_1_1.1 RG1_1_3_1_1.2 RG1_2_1_1_1.1 RG1_2_1_1_1.2 RG1_2_1_1_1_1.1 RG1_2_1_1_1_1.2 RG1_2_2_1_1.1 RG1_2_2_1_1.2 RG1_2_2_1_1_1.1 RG1_2_2_1_1_1.2 RG1_2_3_1.1 RG1_2_3_1.2 RG1_2_3_1_1.1 RG1_2_3_1_1.2 RG1_3_1_1_1.1 RG1_3_1_1_1.2 RG1_3_1_1_1_1.1 RG1_3_1_1_1_1.2 RG1_3_2_1_1.1 RG1_3_2_1_1.2 RG1_3_2_1_1_1.1 RG1_3_2_1_1_1.2 RG1_3_3_1.1 RG1_3_3_1.2 RG1_3_3_1_1.1 RG1_3_3_1_1.2 RG1_4_1_1.1 RG1_4_1_1.2 RG1_4_1_1_1.1 RG1_4_1_1_1.2 RG1_5_1_1.1 RG1_5_1_1.2 RG1_5_1_1_1.1 RG1_5_1_1_1.2 RG1_6_1.1 RG1_6_1.2 RG1_6_1_1.1 RG1_6_1_1.2 RG2_1_1_1_1.1 RG2_1_1_1_1.2 RG2_1_1_1_1_1.1 RG2_1_1_1_1_1.2 RG2_1_2_1_1.1 RG2_1_2_1_1.2 RG2_1_2_1_1_1.1 RG2_1_2_1_1_1.2 RG2_1_3_1.1 RG2_1_3_1.2 RG2_1_3_1_1.1 RG2_1_3_1_1.2 RG2_2_1_1_1.1 RG2_2_1_1_1.2 RG2_2_1_1_1_1.1 RG2_2_1_1_1_1.2 RG2_2_2_1_1.1 RG2_2_2_1_1.2 RG2_2_2_1_1_1.1 RG2_2_2_1_1_1.2 RG2_2_3_1.1 RG2_2_3_1.2 RG2_2_3_1_1.1 RG2_2_3_1_1.2 RG2_3_1_1_1.1 RG2_3_1_1_1.2 RG2_3_1_1_1_1.1 RG2_3_1_1_1_1.2 RG2_3_2_1_1.1 RG2_3_2_1_1.2 RG2_3_2_1_1_1.1 RG2_3_2_1_1_1.2 RG2_3_3_1.1 RG2_3_3_1.2 RG2_3_3_1_1.1 RG2_3_3_1_1.2 RG2_4_1_1.1 RG2_4_1_1.2 RG2_4_1_1_1.1 RG2_4_1_1_1.2 RG2_5_1_1.1 RG2_5_1_1.2 RG2_5_1_1_1.1 RG2_5_1_1_1.2 RG2_6_1.1 RG2_6_1.2 RG2_6_1_1.1 RG2_6_1_1.2 RG3_1_1_1_1.1 RG3_1_1_1_1.2 RG3_1_1_1_1_1.1 RG3_1_1_1_1_1.2 RG3_1_2_1_1.1 RG3_1_2_1_1.2 RG3_1_2_1_1_1.1 RG3_1_2_1_1_1.2 RG3_1_3_1.1 RG3_1_3_1.2 RG3_1_3_1_1.1 RG3_1_3_1_1.2 RG3_2_1_1_1.1 RG3_2_1_1_1.2 RG3_2_1_1_1_1.1 RG3_2_1_1_1_1.2 RG3_2_2_1_1.1 RG3_2_2_1_1.2 RG3_2_2_1_1_1.1 RG3_2_2_1_1_1.2 RG3_2_3_1.1 RG3_2_3_1.2 RG3_2_3_1_1.1 RG3_2_3_1_1.2 RG3_3_1_1_1.1 RG3_3_1_1_1.2 RG3_3_1_1_1_1.1 RG3_3_1_1_1_1.2 RG3_3_2_1_1.1 RG3_3_2_1_1.2 RG3_3_2_1_1_1.1 RG3_3_2_1_1_1.2 RG3_3_3_1.1 RG3_3_3_1.2 RG3_3_3_1_1.1 RG3_3_3_1_1.2 RG3_4_1_1.1 RG3_4_1_1.2 RG3_4_1_1_1.1 RG3_4_1_1_1.2 RG3_5_1_1.1 RG3_5_1_1.2 RG3_5_1_1_1.1 RG3_5_1_1_1.2 RG3_6_1.1 RG3_6_1.2 RG3_6_1_1.1 RG3_6_1_1.2 RG4_1_1_1_1.1 RG4_1_1_1_1.2 RG4_1_1_1_1_1.1 RG4_1_1_1_1_1.2 RG4_1_2_1_1.1 RG4_1_2_1_1.2 RG4_1_2_1_1_1.1 RG4_1_2_1_1_1.2 RG4_1_3_1.1 RG4_1_3_1.2 RG4_1_3_1_1.1 RG4_1_3_1_1.2 RG4_2_1_1_1.1 RG4_2_1_1_1.2 RG4_2_1_1_1_1.1 RG4_2_1_1_1_1.2 RG4_2_2_1_1.1 RG4_2_2_1_1.2 RG4_2_2_1_1_1.1 RG4_2_2_1_1_1.2 RG4_2_3_1.1 RG4_2_3_1.2 RG4_2_3_1_1.1 RG4_2_3_1_1.2 RG4_3_1_1_1.1 RG4_3_1_1_1.2 RG4_3_1_1_1_1.1 RG4_3_1_1_1_1.2 RG4_3_2_1_1.1 RG4_3_2_1_1.2 RG4_3_2_1_1_1.1 RG4_3_2_1_1_1.2 RG4_3_3_1.1 RG4_3_3_1.2 RG4_3_3_1_1.1 RG4_3_3_1_1.2 RG4_4_1_1.1 RG4_4_1_1.2 RG4_4_1_1_1.1 RG4_4_1_1_1.2 RG4_5_1_1.1 RG4_5_1_1.2 RG4_5_1_1_1.1 RG4_5_1_1_1.2 RG4_6_1.1 RG4_6_1.2 RG4_6_1_1.1 RG4_6_1_1.2 U1_1_1_1_1.1 U1_1_1_1_1.2 U1_1_1_1_1.3 U1_1_1_1_1.4 U1_1_1_1_1.5 U1_1_1_1_1.6 U1_1_1_1_1.7 U1_1_1_1_1.8 U1_1_1_1_1.9 U1_1_1_1_1.10 U1_1_1_1_1.11 U1_1_1_1_1.12 U1_1_1_1_1.13 U1_1_1_1_1.14 U1_1_1_1_1_1.1 U1_1_1_1_1_1.2 U1_1_1_1_1_1.3 U1_1_1_1_1_1.4 U1_1_1_1_1_1.5 U1_1_1_1_1_1.6 U1_1_1_1_1_1.7 U1_1_1_1_1_1.8 U1_1_1_1_1_1.9 U1_1_1_1_1_1.10 U1_1_1_1_1_1.11 U1_1_1_1_1_1.12 U1_1_1_1_1_1.13 U1_1_1_1_1_1.14 U1_1_2_1_1.1 U1_1_2_1_1.2 U1_1_2_1_1.3 U1_1_2_1_1.4 U1_1_2_1_1.5 U1_1_2_1_1.6 U1_1_2_1_1.7 U1_1_2_1_1.8 U1_1_2_1_1.9 U1_1_2_1_1.10 U1_1_2_1_1.11 U1_1_2_1_1.12 U1_1_2_1_1.13 U1_1_2_1_1.14 U1_1_2_1_1_1.1 U1_1_2_1_1_1.2 U1_1_2_1_1_1.3 U1_1_2_1_1_1.4 U1_1_2_1_1_1.5 U1_1_2_1_1_1.6 U1_1_2_1_1_1.7 U1_1_2_1_1_1.8 U1_1_2_1_1_1.9 U1_1_2_1_1_1.10 U1_1_2_1_1_1.11 U1_1_2_1_1_1.12 U1_1_2_1_1_1.13 U1_1_2_1_1_1.14 U1_1_3_1.1 U1_1_3_1.2 U1_1_3_1.3 U1_1_3_1.4 U1_1_3_1.5 U1_1_3_1.6 U1_1_3_1.7 U1_1_3_1.8 U1_1_3_1.9 U1_1_3_1.10 U1_1_3_1.11 U1_1_3_1.12 U1_1_3_1.13 U1_1_3_1.14 U1_1_3_1_1.1 U1_1_3_1_1.2 U1_1_3_1_1.3 U1_1_3_1_1.4 U1_1_3_1_1.5 U1_1_3_1_1.6 U1_1_3_1_1.7 U1_1_3_1_1.8 U1_1_3_1_1.9 U1_1_3_1_1.10 U1_1_3_1_1.11 U1_1_3_1_1.12 U1_1_3_1_1.13 U1_1_3_1_1.14 U1_2_1_1_1.1 U1_2_1_1_1.2 U1_2_1_1_1.3 U1_2_1_1_1.4 U1_2_1_1_1.5 U1_2_1_1_1.6 U1_2_1_1_1.7 U1_2_1_1_1.8 U1_2_1_1_1.9 U1_2_1_1_1.10 U1_2_1_1_1.11 U1_2_1_1_1.12 U1_2_1_1_1.13 U1_2_1_1_1.14 U1_2_1_1_1_1.1 U1_2_1_1_1_1.2 U1_2_1_1_1_1.3 U1_2_1_1_1_1.4 U1_2_1_1_1_1.5 U1_2_1_1_1_1.6 U1_2_1_1_1_1.7 U1_2_1_1_1_1.8 U1_2_1_1_1_1.9 U1_2_1_1_1_1.10 U1_2_1_1_1_1.11 U1_2_1_1_1_1.12 U1_2_1_1_1_1.13 U1_2_1_1_1_1.14 U1_2_2_1_1.1 U1_2_2_1_1.2 U1_2_2_1_1.3 U1_2_2_1_1.4 U1_2_2_1_1.5 U1_2_2_1_1.6 U1_2_2_1_1.7 U1_2_2_1_1.8 U1_2_2_1_1.9 U1_2_2_1_1.10 U1_2_2_1_1.11 U1_2_2_1_1.12 U1_2_2_1_1.13 U1_2_2_1_1.14 U1_2_2_1_1_1.1 U1_2_2_1_1_1.2 U1_2_2_1_1_1.3 U1_2_2_1_1_1.4 U1_2_2_1_1_1.5 U1_2_2_1_1_1.6 U1_2_2_1_1_1.7 U1_2_2_1_1_1.8 U1_2_2_1_1_1.9 U1_2_2_1_1_1.10 U1_2_2_1_1_1.11 U1_2_2_1_1_1.12 U1_2_2_1_1_1.13 U1_2_2_1_1_1.14 U1_2_3_1.1 U1_2_3_1.2 U1_2_3_1.3 U1_2_3_1.4 U1_2_3_1.5 U1_2_3_1.6 U1_2_3_1.7 U1_2_3_1.8 U1_2_3_1.9 U1_2_3_1.10 U1_2_3_1.11 U1_2_3_1.12 U1_2_3_1.13 U1_2_3_1.14 U1_2_3_1_1.1 U1_2_3_1_1.2 U1_2_3_1_1.3 U1_2_3_1_1.4 U1_2_3_1_1.5 U1_2_3_1_1.6 U1_2_3_1_1.7 U1_2_3_1_1.8 U1_2_3_1_1.9 U1_2_3_1_1.10 U1_2_3_1_1.11 U1_2_3_1_1.12 U1_2_3_1_1.13 U1_2_3_1_1.14 U1_3_1_1_1.1 U1_3_1_1_1.2 U1_3_1_1_1.3 U1_3_1_1_1.4 U1_3_1_1_1.5 U1_3_1_1_1.6 U1_3_1_1_1.7 U1_3_1_1_1.8 U1_3_1_1_1.9 U1_3_1_1_1.10 U1_3_1_1_1.11 U1_3_1_1_1.12 U1_3_1_1_1.13 U1_3_1_1_1.14 U1_3_1_1_1_1.1 U1_3_1_1_1_1.2 U1_3_1_1_1_1.3 U1_3_1_1_1_1.4 U1_3_1_1_1_1.5 U1_3_1_1_1_1.6 U1_3_1_1_1_1.7 U1_3_1_1_1_1.8 U1_3_1_1_1_1.9 U1_3_1_1_1_1.10 U1_3_1_1_1_1.11 U1_3_1_1_1_1.12 U1_3_1_1_1_1.13 U1_3_1_1_1_1.14 U1_3_2_1_1.1 U1_3_2_1_1.2 U1_3_2_1_1.3 U1_3_2_1_1.4 U1_3_2_1_1.5 U1_3_2_1_1.6 U1_3_2_1_1.7 U1_3_2_1_1.8 U1_3_2_1_1.9 U1_3_2_1_1.10 U1_3_2_1_1.11 U1_3_2_1_1.12 U1_3_2_1_1.13 U1_3_2_1_1.14 U1_3_2_1_1_1.1 U1_3_2_1_1_1.2 U1_3_2_1_1_1.3 U1_3_2_1_1_1.4 U1_3_2_1_1_1.5 U1_3_2_1_1_1.6 U1_3_2_1_1_1.7 U1_3_2_1_1_1.8 U1_3_2_1_1_1.9 U1_3_2_1_1_1.10 U1_3_2_1_1_1.11 U1_3_2_1_1_1.12 U1_3_2_1_1_1.13 U1_3_2_1_1_1.14 U1_3_3_1.1 U1_3_3_1.2 U1_3_3_1.3 U1_3_3_1.4 U1_3_3_1.5 U1_3_3_1.6 U1_3_3_1.7 U1_3_3_1.8 U1_3_3_1.9 U1_3_3_1.10 U1_3_3_1.11 U1_3_3_1.12 U1_3_3_1.13 U1_3_3_1.14 U1_3_3_1_1.1 U1_3_3_1_1.2 U1_3_3_1_1.3 U1_3_3_1_1.4 U1_3_3_1_1.5 U1_3_3_1_1.6 U1_3_3_1_1.7 U1_3_3_1_1.8 U1_3_3_1_1.9 U1_3_3_1_1.10 U1_3_3_1_1.11 U1_3_3_1_1.12 U1_3_3_1_1.13 U1_3_3_1_1.14 U1_4_1_1.1 U1_4_1_1.2 U1_4_1_1.3 U1_4_1_1.4 U1_4_1_1.5 U1_4_1_1.6 U1_4_1_1.7 U1_4_1_1.8 U1_4_1_1.9 U1_4_1_1.10 U1_4_1_1.11 U1_4_1_1.12 U1_4_1_1.13 U1_4_1_1.14 U1_4_1_1_1.1 U1_4_1_1_1.2 U1_4_1_1_1.3 U1_4_1_1_1.4 U1_4_1_1_1.5 U1_4_1_1_1.6 U1_4_1_1_1.7 U1_4_1_1_1.8 U1_4_1_1_1.9 U1_4_1_1_1.10 U1_4_1_1_1.11 U1_4_1_1_1.12 U1_4_1_1_1.13 U1_4_1_1_1.14 U1_5_1_1.1 U1_5_1_1.2 U1_5_1_1.3 U1_5_1_1.4 U1_5_1_1.5 U1_5_1_1.6 U1_5_1_1.7 U1_5_1_1.8 U1_5_1_1.9 U1_5_1_1.10 U1_5_1_1.11 U1_5_1_1.12 U1_5_1_1.13 U1_5_1_1.14 U1_5_1_1_1.1 U1_5_1_1_1.2 U1_5_1_1_1.3 U1_5_1_1_1.4 U1_5_1_1_1.5 U1_5_1_1_1.6 U1_5_1_1_1.7 U1_5_1_1_1.8 U1_5_1_1_1.9 U1_5_1_1_1.10 U1_5_1_1_1.11 U1_5_1_1_1.12 U1_5_1_1_1.13 U1_5_1_1_1.14 U1_6_1.1 U1_6_1.2 U1_6_1.3 U1_6_1.4 U1_6_1.5 U1_6_1.6 U1_6_1.7 U1_6_1.8 U1_6_1.9 U1_6_1.10 U1_6_1.11 U1_6_1.12 U1_6_1.13 U1_6_1.14 U1_6_1_1.1 U1_6_1_1.2 U1_6_1_1.3 U1_6_1_1.4 U1_6_1_1.5 U1_6_1_1.6 U1_6_1_1.7 U1_6_1_1.8 U1_6_1_1.9 U1_6_1_1.10 U1_6_1_1.11 U1_6_1_1.12 U1_6_1_1.13 U1_6_1_1.14